# Altium PCB PCB1.PcbDoc
Units mm, origin at the board's own origin, x right, y up, seen from the top; angles counter-clockwise.
Board outline 64.95 x 42.67 mm, 2 copper layers (Top Layer, Bottom Layer); 12 components, 14 nets, 49 pads, 2 vias.
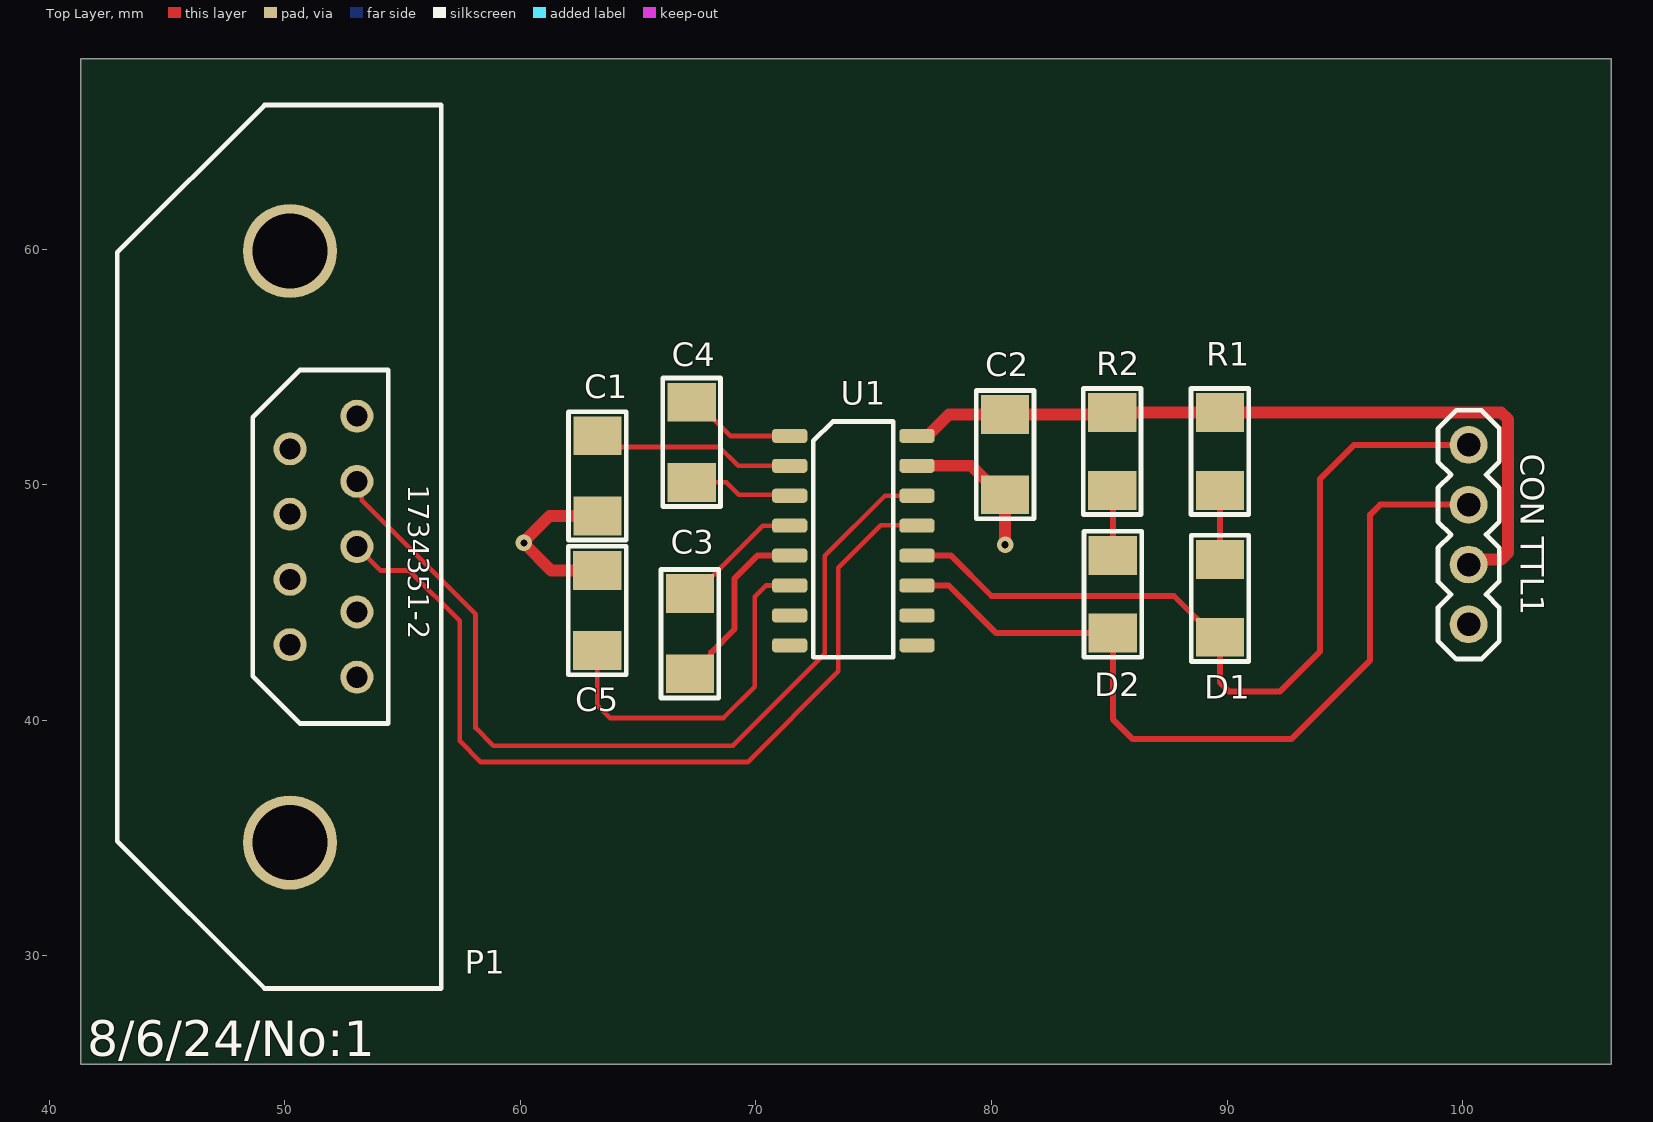
[diagram p0: Top Layer view]
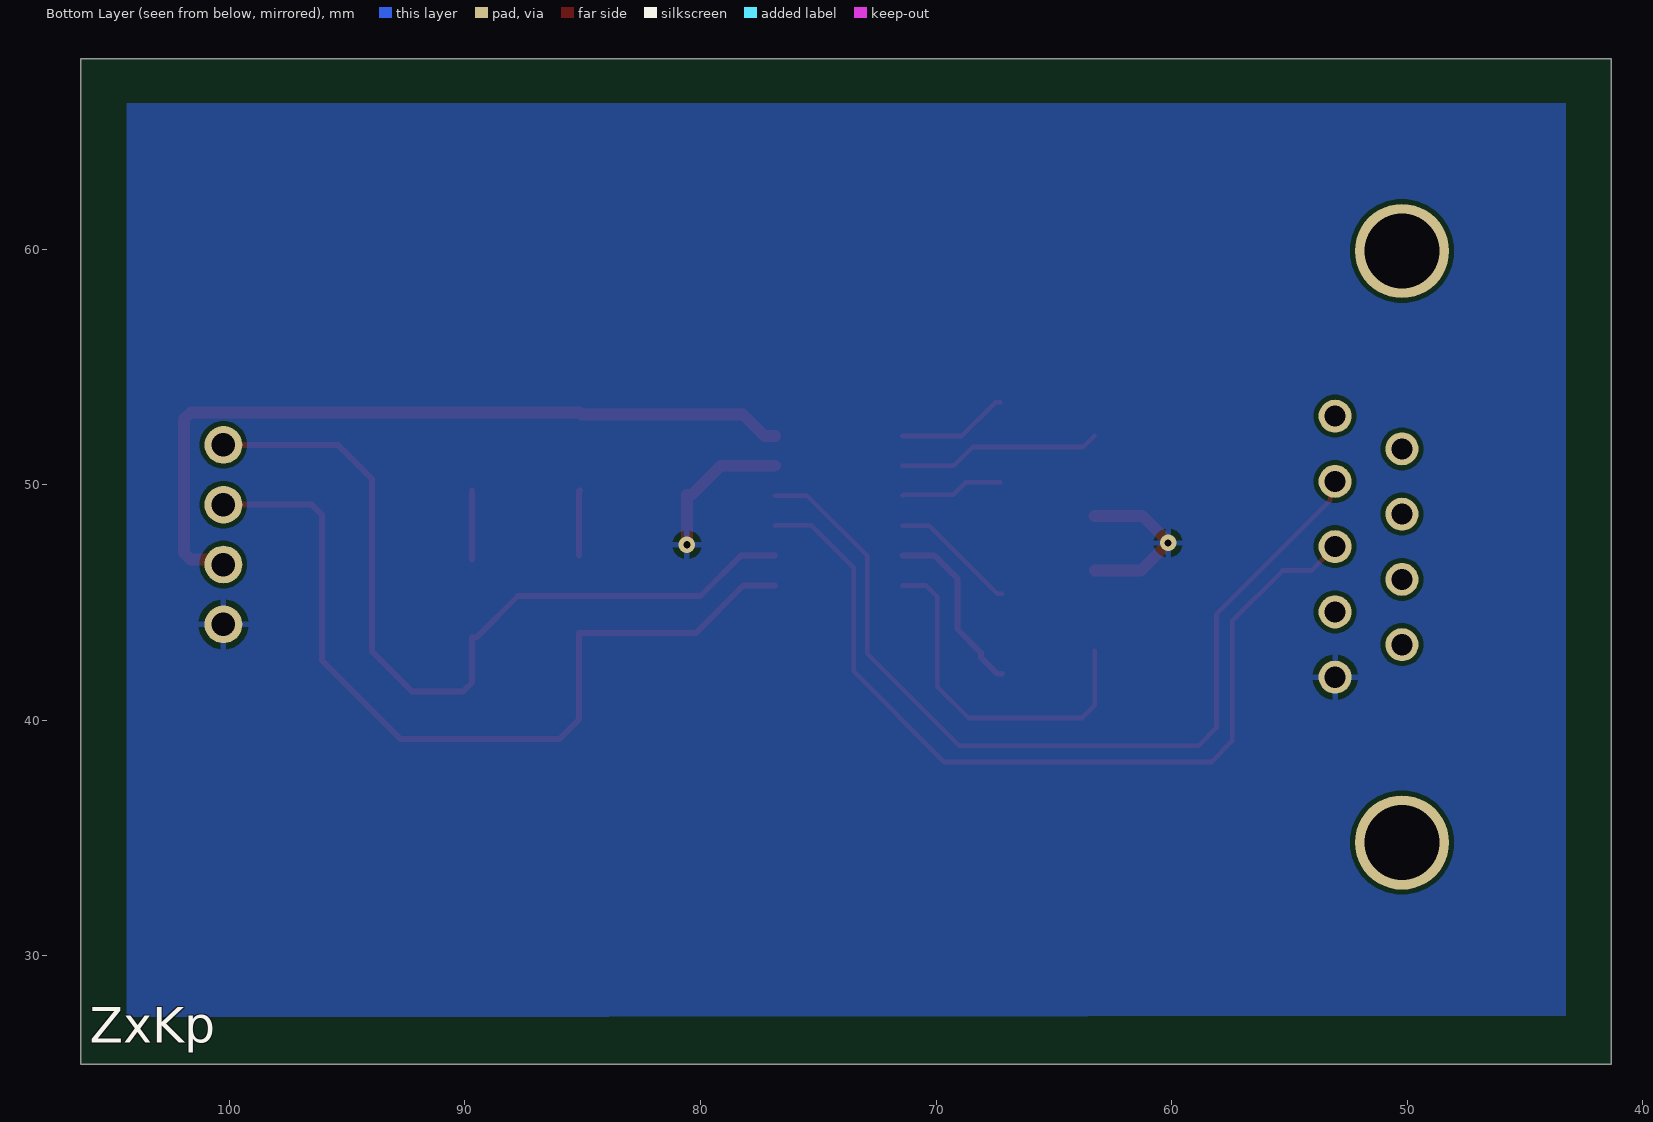
[diagram p1: Bottom Layer view, seen from below]
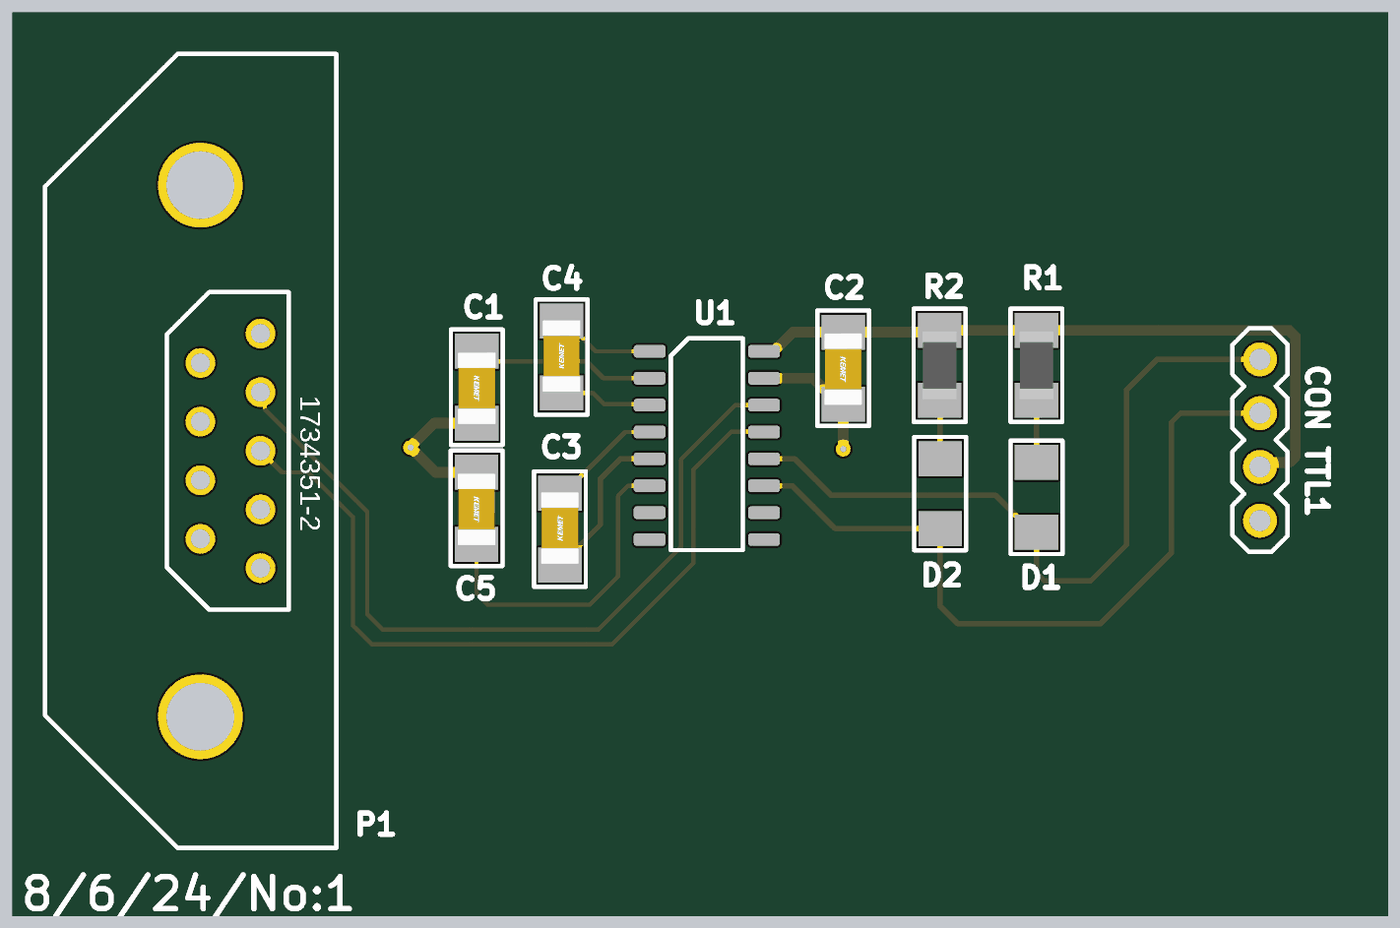
[diagram p2: 3D render of the assembled board from above, using the file's embedded part models]

## Layer stack, top to bottom
Top Solder: solder mask 0.0102, Solder Resist, Dk 3.5
Top Layer: signal copper 0.0356
Dielectric 1: dielectric 0.32, FR-4, Dk 4.8
Bottom Layer: signal copper 0.0356
Bottom Solder: solder mask 0.0102, Solder Resist, Dk 3.5

## Board outline
41.35,25.4 41.35,68.072 106.299,68.072 106.299,25.4

## Design rules (kind name [scope] priority, off if disabled: settings)
Clearance [All] p1: gap=0.2 ignorepadtopadclearanceinfootprint=FALSE
PolygonConnect [All] p1: connectstyle=Relief reliefconductorwidth=0.254 reliefentries=4 polygonreliefangle="90 Angle" airgapwidth=0.254
RoutingVias [All] p1: holewidth=0.3 width=0.7 viastyle="Through Hole" minholewidth=0.3 minwidth=0.7 maxholewidth=0.3 maxwidth=0.7
SolderMaskExpansion [All] p1: expansion=0.102 istentingtop=FALSE
Width [All] p1: maxlimit=1 minlimit=0.2 preferedwidth=0.2
30 further rules are at their usual default settings.

## Components (designator, comment, footprint, x,y, rotation, side; value= is the part's Value field where it differs from the comment)
C1 "470nF" 1206-C 63.275,50.325 r270 top
C2 "100nF" 1206-C 80.575,51.226 r270 top
C3 "470nF" 1206-C 67.2,43.725 r90 top
C4 "100nF" 1206-C 67.275,51.85 r90 top
C5 "470nF" 1206-C 63.266,44.607 r270 top
"CON TTL1" "CON 4" "CON-4 2.54" 100.25,47.88 r270 top
D1 "LED" 1206-D 89.7,45.175 r270 top
D2 "LED" 1206-D 85.15,45.35 r270 top
P1 "1734351-2" 1734351-2 51.645,47.365 r270 top
R1 "1k" 1206-R 89.697,51.41 r270 top
R2 "1k" 1206-R 85.125,51.41 r270 top
U1 "MAX232IDR" MAX232IDR 73.485,50.38 r0 top

## Footprints (in the part's own frame and the unit in brackets; to place one, negate y for a bottom-side part, rotate by r counter-clockwise, add the part's x,y. Pads: shape width x height; smd on the part's side, far side on the other; paste and mask are expansions set on the pad)
1206-C [mm]
  rect 1.65x2.05 smd: 1(-1.75,0) 2(1.651,0)
  silkscreen extent -2.78,-1.22 2.68,1.22, body extent -1.7,-0.9 1.7,0.9, height 0.88
1206-D [mm]
  rect 1.65x2.05 smd: 1(-1.651,0) 2(1.651,0)
  silkscreen extent -2.68,-1.22 2.68,1.22, body extent -1.6,-0.8 1.6,0.8, height 0.25
1206-R [mm]
  rect 1.65x2.05 smd: 1(-1.651,0) 2(1.651,0)
  silkscreen extent -2.68,-1.22 2.68,1.22, body extent -1.6,-0.8 1.6,0.8, height 0.54
1734351-2 [mm]
  round 1.4 hole 0.9: 1(-5.545,1.42) 2(-2.775,1.42) 3(-0.005,1.42) 4(2.765,1.42) 5(5.535,1.42) 6(-4.155,-1.42) 7(-1.385,-1.42) 8(1.385,-1.42) 9(4.155,-1.42)
  round 4 hole 3.2: 10(-12.555,-1.42) 11(12.555,-1.42)
  silkscreen extent -18.75,-8.75 18.75,5
"CON-4 2.54" [mm]
  round 1.6 hole 1: 1(-3.81,0) 2(-1.27,0) 3(1.27,0) 4(3.81,0)
  silkscreen extent -5.28,-1.3 5.28,1.3
MAX232IDR [mm]
  rrect50% 1.5x0.6 smd: 1(-2.05,1.69) 2(-2.05,0.42) 3(-2.05,-0.85) 4(-2.05,-2.12) 5(-2.05,-3.39) 6(-2.05,-4.66) 7(-2.05,-5.93) 8(-2.05,-7.2) 9(3.35,-7.2) 10(3.35,-5.93) 11(3.35,-4.66) 12(3.35,-3.39) 13(3.35,-2.12) 14(3.35,-0.85) 15(3.35,0.42) 16(3.35,1.69)
  silkscreen extent -1.05,-7.7 2.35,2.3

## Part data
C1 C2 C3 C4 C5: library part Cap, "Capacitor", LatestRevisionDate=17-Jul-2002, LatestRevisionNote="Re-released for DXP Platform.", PackageDescription="Radial Cap, Thru-Hole; 2 Leads; 0.3 in Pin Spacing", PackageReference=RAD-0.3, Published=8-Jun-2000, Publisher="Altium Limited"
D1 D2: "Typical INFRARED GaAs LED", LatestRevisionDate=08-Jul-2005, LatestRevisionNote="Mech Layer 1 removed.", PackageDescription="LED; 2 Leads", PackageReference=LED-0, Published=8-Jun-2000, Publisher="Altium Limited"
P1: library part CN-2S-2M-D9, "Male D-Sub Connector, Pitch 2.77 mm, 9 Position, Height 12.75 mm, Tail Length 3.2 mm, -55 to 105 degC, RoHS, Tray", Color=Black, Current Rating=2A, Manufacturer="TE Connectivity", Operating Temperature=-55°C~105°C, Package Description="Male D-Sub Connector, Pitch 2.77 mm, 9 Position, Height 12.75 mm, Tail Length 3.2 mm", Standard Package=90, Voltage Rating=250V, Catalog Drawings=AMPD-SubMale.318, Category=Connectors,Interconnects, Connector Style=D-Sub, Connector Type=Plug,MalePins, Contact Finish=Gold, Contact Finish Thickness=15µin(0.38µm), Contact Type=Signal, Datasheet URL=https://datasheet.ciiva.com/25605/0900766b80f99384-25605515.pdf, Datasheet Version="Rev. A1, 03/2011", Dynamic Catalog=AMPLIMITEHD-20Series, Family=D-SubConnectors, Featured Product=AMPLIMITED-SubminiatureConnectors, Features=BoardLock,GroundingIndents, Flange Feature=MatingSide;FemaleScrewlock(4-40), Housing Material=PolybutyleneTerephthalate(PBT), Manufacturer URL=http://www.te.com/, Mating Products="5746861-4-ND / -CONNRECEPT9POSGOLDIDC / AFL09B-ND / -CONND-SUBRECEPT9POS30GOLD", Mounting Technology=ThroughHole, Mounting Type=ThroughHole,RightAngle, Number of Positions=9, Number of Rows=2, Other Names=A35106, Package Reference=1734351-2, Product Training Modules=AMPLIMITED-SubConnectors, RoHS Information=1734351-2StatementofCompliance, Series=AMPLIMITEHD-20, Shell Material, Finish=Steel,NickelPlated, Shell Size, Connector Layout=1(DE,E), Termination=Solder
R1 R2: library part Res_2
U1: "No Description Available", Mfr_Name="Texas Instruments", Copyright="Copyright (C) 2022 Ultra Librarian. All rights reserved.", Manufacturer_Part_Number=MAX232IDR, RefDes=RefDes, Type=DEV

## Via types
v1: diameter 0.7, hole 0.3, Top Layer to Bottom Layer, 2 vias

## Nets (pads, with @x,y where several pads share a name; then routed paths per layer and width w, separated by ;. In a path a pad name is that pad's centre, name@x,y a point inside that pad or via, vN(x,y) a via of type N, cw(c..) or ccw(c..) an arc to the next point about the centre after c; other vN are vias at no path point)
gnd: "CON TTL1.4" C1.2 C2.2 C5.1 P1.5 U1.15 | length 13.6
  Top Layer w0.5: C5.1 61.318,46.357 v1(60.15,47.525) 60.15,47.575 61.249,48.674 C1.2 ; U1.15 79.15,50.8 80.375,49.575 C2.2 v1(80.575,47.45)
NetC1_1: C1.1 U1.2 | length 8.7
  Top Layer w0.2: C1.1 63.75,51.6 68.45,51.6 69.25,50.8 U1.2
NetC3_1: C3.1 U1.5 | length 7.7
  Top Layer w0.254: C3.1 67.4,41.975 68.098,42.673 68.098,42.873 69.1,43.875 69.1,46.025 70.075,47 71.425,47 U1.5
NetC3_2: C3.2 U1.4 | length 5.4
  Top Layer w0.2: C3.2 67.4,45.376 70.284,48.26 U1.4
NetC4_1: C4.1 U1.3 | length 4.4
  Top Layer w0.2: C4.1 68.75,50.1 69.275,49.575 71.39,49.575 U1.3
NetC4_2: C4.2 U1.1 | length 4.8
  Top Layer w0.2: C4.2 67.475,53.501 68.906,52.07 U1.1
NetC5_2: C5.2 U1.6 | length 15.3
  Top Layer w0.2: C5.2 63.266,40.634 63.8,40.1 68.625,40.1 69.95,41.425 69.95,45.25 70.42,45.72 U1.6
NetD1_1: D1.1 R1.2 | length 2.9
  Top Layer w0.254: R1.2 89.7,49.756 D1.1
NetD2_1: D2.1 R2.2 | length 2.8
  Top Layer w0.254: R2.2 85.15,49.734 D2.1
NetP1_2: P1.2 U1.14 | length 38.4
  Top Layer w0.2: P1.2 53.27,49.935 53.27,49.33 58.1,44.5 58.1,39.675 58.85,38.925 69.025,38.925 72.925,42.825 72.925,46.975 75.48,49.53 U1.14
NetP1_3: P1.3 U1.13 | length 37.3
  Top Layer w0.2: P1.3 54.08,46.355 55.295,46.355 57.425,44.225 57.425,39.125 58.325,38.225 69.65,38.225 73.5,42.075 73.5,46.475 75.3,48.275 76.82,48.275 U1.13
RX: "CON TTL1.2" D2.2 U1.11 | length 36
  Top Layer w0.254: U1.11 78.18,45.72 80.201,43.699 D2.2 85.15,40.05 86,39.2 92.725,39.2 96.075,42.55 96.075,48.725 96.5,49.15 100.25,49.15
TX: "CON TTL1.1" D1.2 U1.12 | length 35.6
  Top Layer w0.254: U1.12 78.285,46.99 80,45.275 87.749,45.275 89.5,43.524 D1.2 89.7,41.6 90.075,41.225 92.25,41.225 93.95,42.925 93.95,50.25 95.39,51.69 100.25,51.69
vcc: "CON TTL1.3" C2.1 R1.1 R2.1 U1.16 | length 33.2
  Top Layer w0.5: U1.16 77.285,52.07 78.19,52.975 80.574,52.975 C2.1 85.04,52.976 R2.1 R1.1 101.632,53.061 101.925,52.768 101.925,47.113 101.632,46.82 100.46,46.82 100.25,46.61
pads on no net: P1.1 P1.4 P1.6 P1.7 P1.8 P1.9 P1.10 P1.11 U1.7 U1.8 U1.9 U1.10

## Polygon pours and split planes (outlines as drawn)
gnd on Bottom Layer "GND_L02_P000" (solid, pour order 0): 43.275,27.45 43.275,66.2 104.325,66.2 104.35,66.175 104.35,27.4

## Silkscreen, mask and mechanical layers (free items; w line width, h text height)
Top Overlay:
  text "8/6/24/No:1" at 41.629,25.729 h1.52
Bottom Overlay:
  text "ZxKp" at 105.921,26.312 h1.52
Mechanical 1:
  the board outline again, w0.2